# Altium PCB PCB1.PcbDoc
Units mil, origin at the board's own origin, x right, y up, seen from the top; angles counter-clockwise.
Board outline 6000 x 4000 mil, 2 copper layers (Top Layer, Bottom Layer); 16 components, 9 nets, 48 pads, 24 vias.
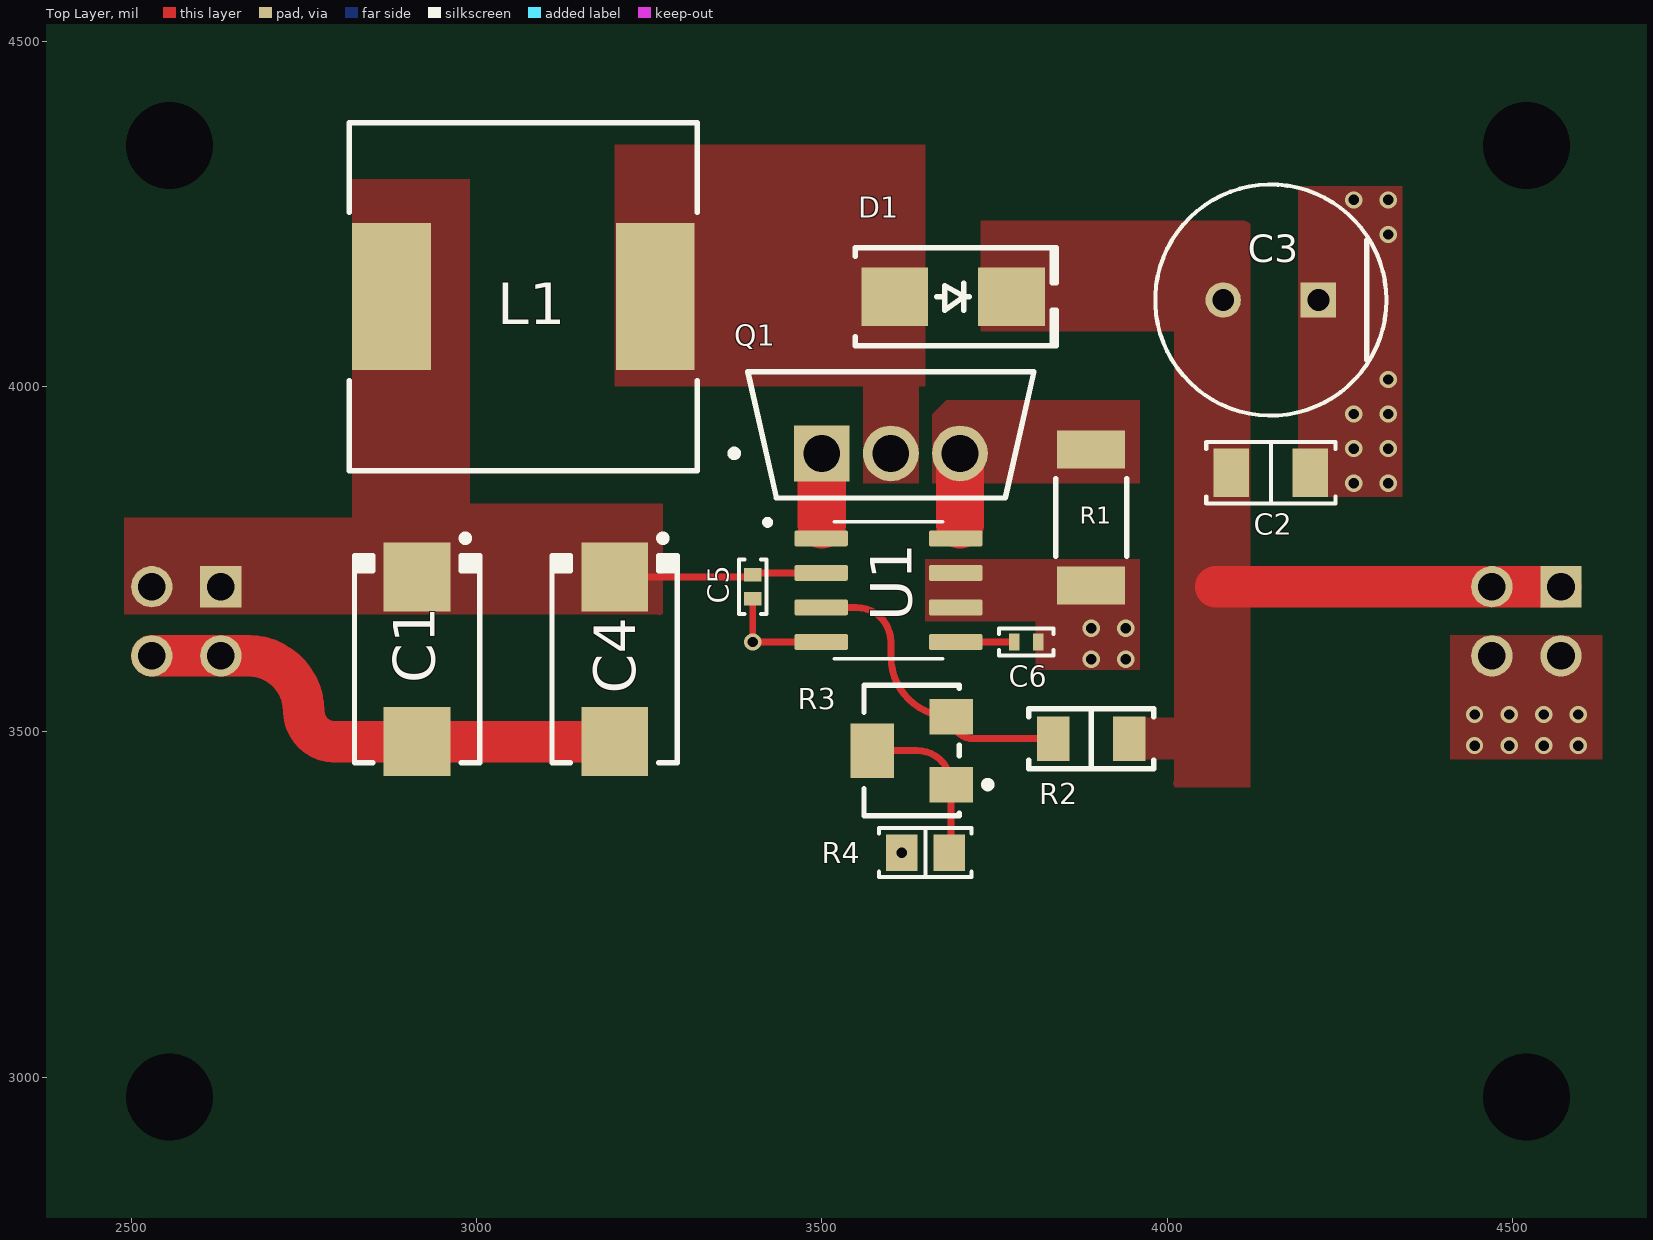
[diagram p0: Top Layer view]
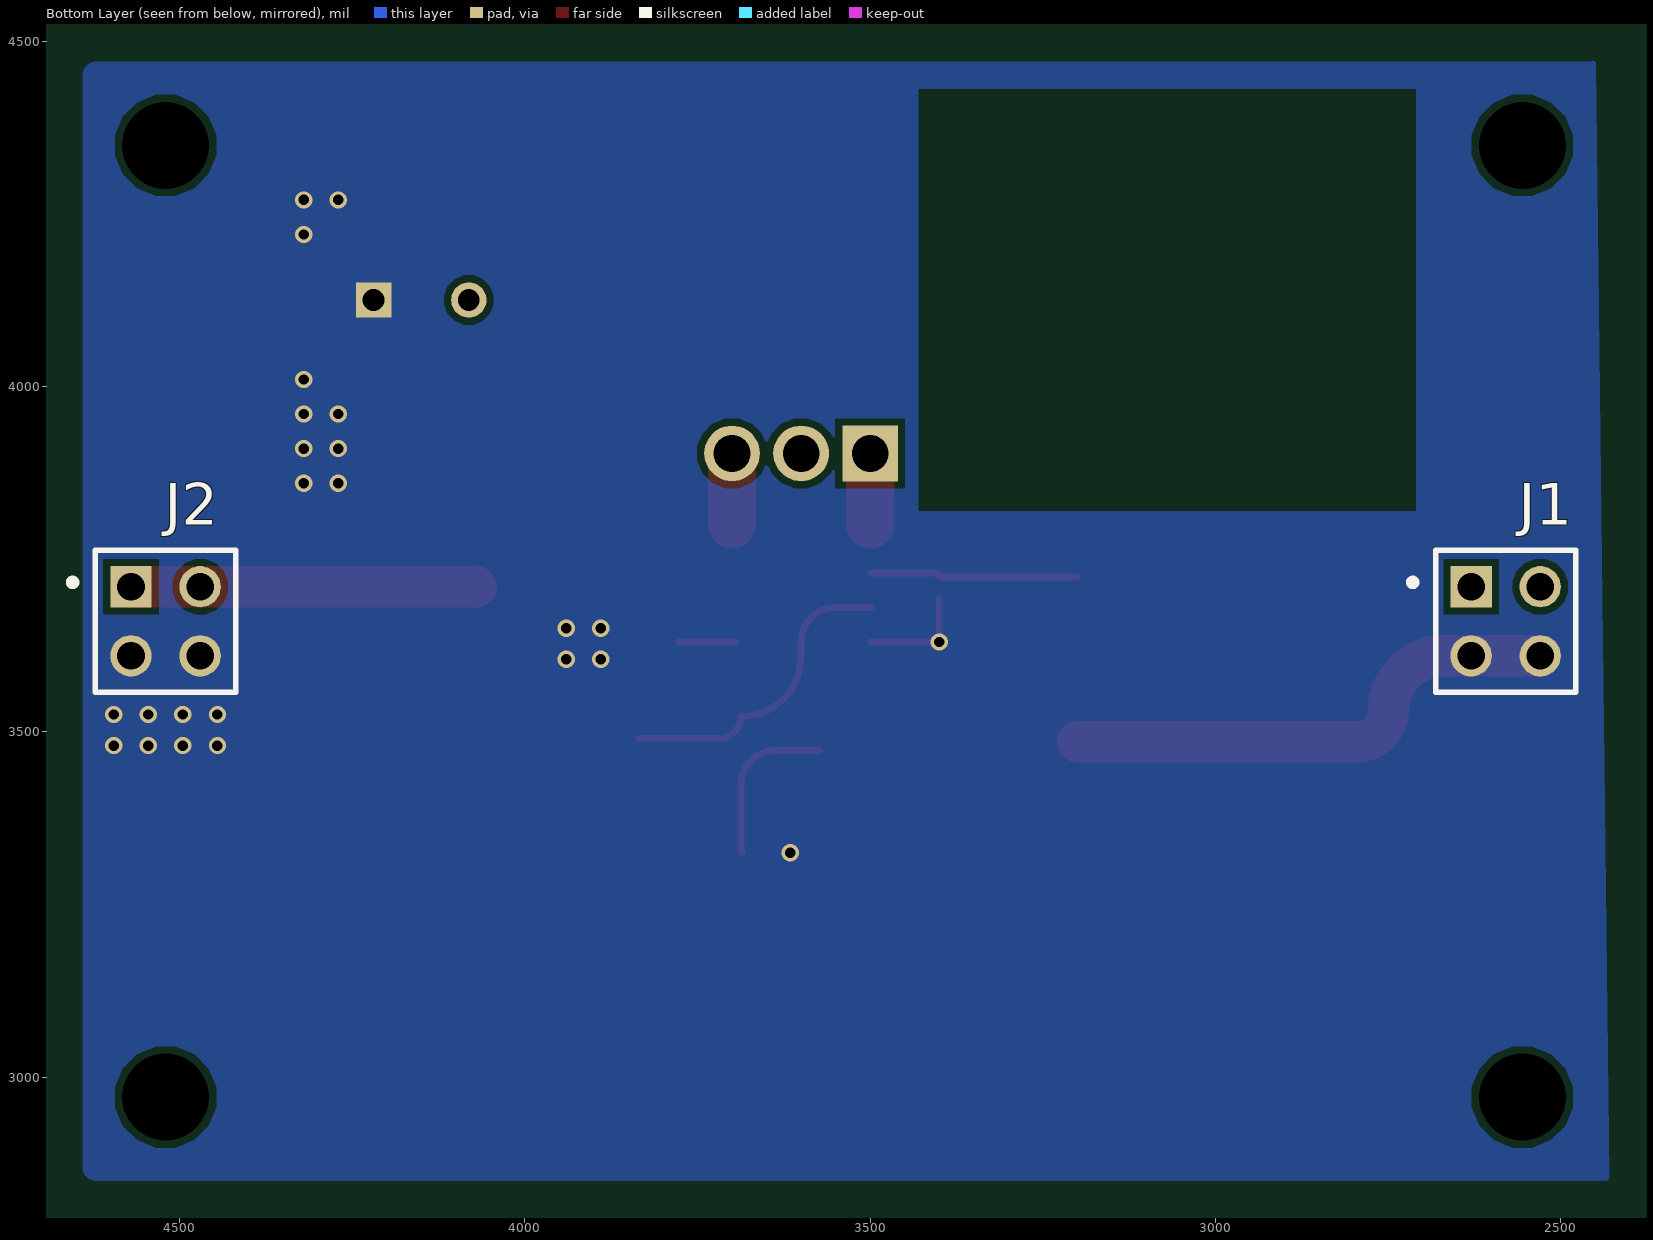
[diagram p1: Bottom Layer view, seen from below]
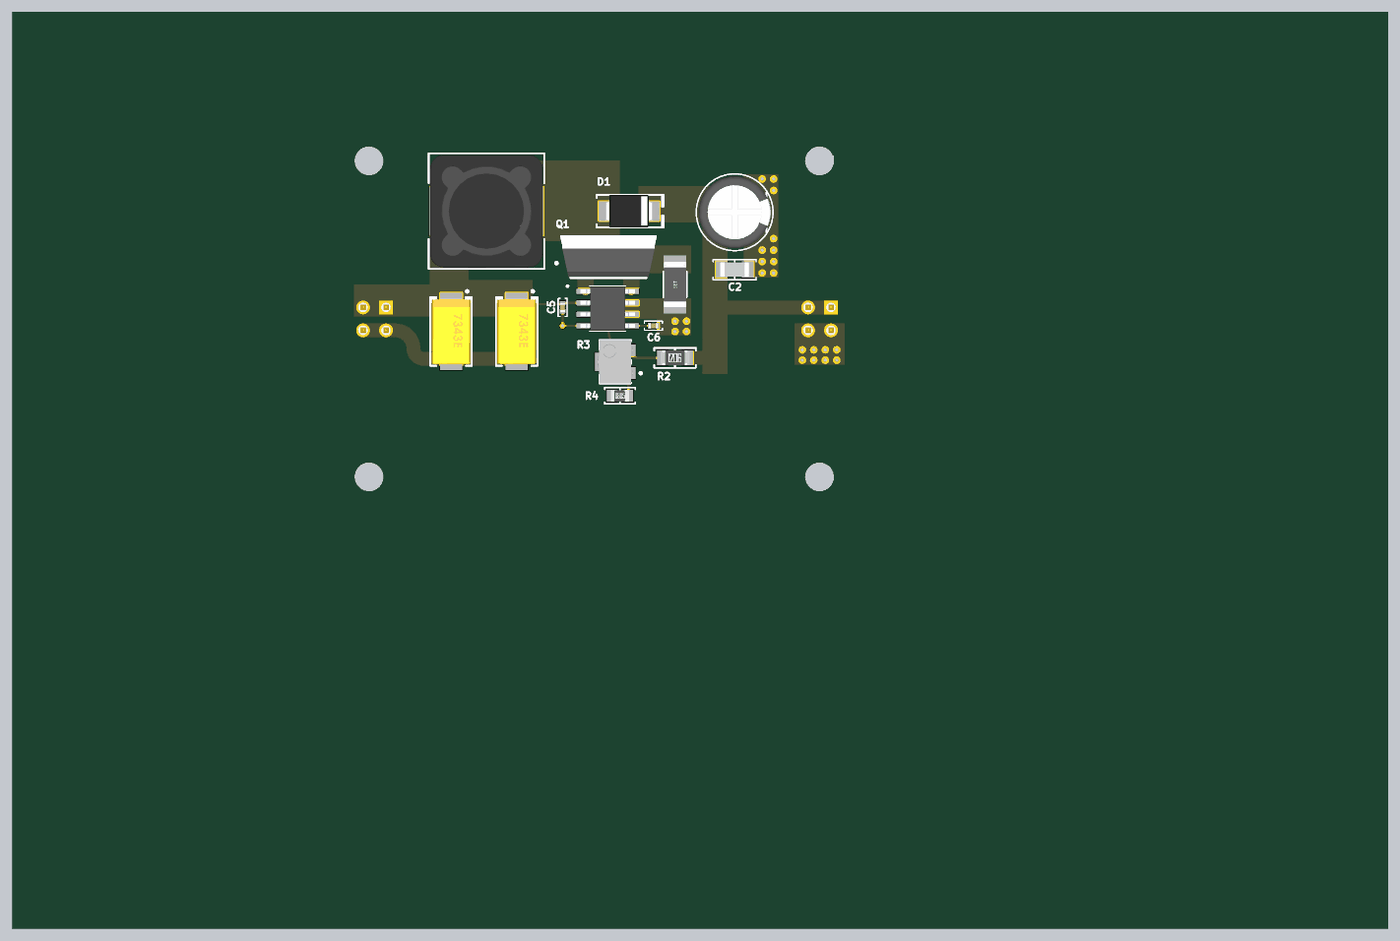
[diagram p2: 3D render of the assembled board from above, using the file's embedded part models]

## Layer stack, top to bottom
Top Solder: solder mask 0.4, Solder Resist, Dk 3.5
Top Layer: signal copper 1.4
Dielectric 1: dielectric 12.6, FR-4, Dk 4.8
Bottom Layer: signal copper 1.4
Bottom Solder: solder mask 0.4, Solder Resist, Dk 3.5

## Board outline
1000,1000 7000,1000 7000,5000 1000,5000

## Design rules (kind name [scope] priority, off if disabled: settings)
Clearance [All] p1: gap=10 ignorepadtopadclearanceinfootprint=FALSE except(0: Arc-Hole Track-Hole SMDPad-Hole THPad-Hole Via-Hole Fill-Hole Poly-Hole Region-Hole Text-Hole)
HoleSize [All] p1: absolutevalues=TRUE maxlimit=200 minlimit=1 maxpercent=80.000 minpercent=20.000
MinimumSolderMaskSliver [All] p1: minsoldermaskwidth=6
PolygonConnect [All] p1: connectstyle=Direct reliefconductorwidth=10 reliefentries=4 polygonreliefangle="90 Angle" airgapwidth=10
RoomDefinition HV [InComponentClass('HV')] p1: confinementstyle=ConfineIn formatcopy=TRUE lockcomponents=FALSE outline 2420,2820 4670,2820 4670,4520 2420,4520
RoutingVias [All] p1: holewidth=10 width=20 viastyle="Through Hole" minholewidth=10 minwidth=20 maxholewidth=28 maxwidth=50
SilkToSilkClearance [All] p1: silktosilkclearance=7
SilkToSolderMaskClearance [IsPad] p1: minsilkscreentomaskgap=4 clearancetoexposedcopper=TRUE
SolderMaskExpansion [All] p1: expansion=4 istentingtop=FALSE
Width [All] p1: maxlimit=100 minlimit=10 preferedwidth=10 bottomlayer_maxwidth=10 minimp=50.000000 maximp=50.000000 favimp=50.000000
26 further rules are at their usual default settings.

## Components (designator, comment, footprint, x,y, rotation, side; value= is the part's Value field where it differs from the comment)
C1 "100uF" "CAP POL 2917_7343" 2914.06,3605 r270 top value="100 µF"
C2 "0.1 µF" "CAP 1206_3216 - 0.8MM" 4150,3875 r180 top
C3 "4.7uF 250V" FP-RAD-TH-D_8_0_5-L_11_5-MFG 4150,4125 r180 top
C4 "10 µF" "CAP POL 2917_7343" 3200,3605 r270 top
C5 "0.1 µF" "CAP 0402_1005"#1 3400,3710 r90 top
C6 "0.1 µF" "CAP 0402_1005"#2 3795.88,3630 r180 top
D1 "ES2F-E3/5BT" "DO214AA SMB" 3690,4130 r0 top
J1 "HTSW-102-07-G-D" FP-HTSW-102-07-G-D-MFG 2580,3660 r270 bottom
J2 "HTSW-102-07-G-D" FP-HTSW-102-07-G-D-MFG 4520,3660 r270 bottom
L1 "100uH" "BOURNS SRR1280" 3067.94,4130 r0 top
Q1 "IRF644PBF" FP-E21-0621-MFG 3600,3930 r90 top
R1 "50m" FP-CSRN2010-MFG 3890,3810 r90 top
R2 "1.5 MOhms" "RES 1206_3216" 3890,3490 r0 top
R3 "3214W-1-502E" BOUR-3214W_V 3630,3472.81 r180 top
R4 "10 kOhms" "RES 0805_2012" 3650,3325 r0 top
U1 "MAX1771CSA" SOIC127P600X175-8N 3596.5,3705 r0 top

## Footprints (in the part's own frame and the unit in brackets; to place one, negate y for a bottom-side part, rotate by r counter-clockwise, add the part's x,y. Pads: shape width x height; smd on the part's side, far side on the other; paste and mask are expansions set on the pad)
BOUR-3214W_V [mm] "SMD, 3-Leads, Body 3.5x4.8mm, Pitch 1.25mm"
  rect 1.6x1.3 smd paste+0: 1(-1.45,1.25) 3(-1.45,-1.25)
  rect 1.6x2 smd paste+0: 2(1.45,0)
  silkscreen extent -2.93,-2.4 1.75,2.4, body extent -1.98,-2.41 1.98,2.41, height 5.28
"BOURNS SRR1280" [mm] "Precision Wire Wound Inductor, 2-Leads, Body 12.50x12.50mm, IPC Medium Density"
  rect 2.9x5.4 smd: 1(-4.85,0) 2(4.85,0)
  silkscreen extent -6.4,-6.4 6.4,6.4, body extent -6.25,-6.25 6.25,6.25, height 7.9
"CAP 0402_1005"#1 [mm] "Chip Capacitor, 2-Leads, Body 1.02x0.51mm, IPC Medium Density"
  rect 0.508x0.64 smd: 1(-0.44,0) 2(0.44,0)
  silkscreen extent -1,-0.5 1,0.5, body extent -0.5,-0.26 0.5,0.26, height 0.52
"CAP 0402_1005"#2 [mm] "Chip Capacitor, 2-Leads, Body 1.02x0.51mm, IPC Medium Density"
  rect 0.381x0.64 smd: 1(-0.44,0)
  rect 0.381x0.635 smd: 2(0.44,0)
  silkscreen extent -1,-0.5 1,0.5, body extent -0.5,-0.26 0.5,0.26, height 0.52
"CAP 1206_3216 - 0.8MM" [mm] "Chip Capacitor, 2-Leads, Body 3.25x1.60mm, IPC Medium Density"
  rect 1.3x1.8 smd: 1(-1.45,0) 2(1.45,0)
  silkscreen extent -2.37,-1.12 2.37,1.12, body extent -1.6,-0.8 1.6,0.8, height 0.8
"CAP POL 2917_7343" [mm] "Molded Capacitor, 2-Leads, Body 7.30x4.30mm, IPC Medium Density"
  rect 2.55x2.45 smd: 1(-3.025,0) 2(3.025,0)
  silkscreen extent -4.57,-2.3 3.8,2.3, body extent -3.65,-2.15 3.65,2.15, height 4.1
"DO214AA SMB" [mm] "Molded Diode, 2-Leads, Body 4.31x3.62mm, IPC Medium Density"
  rect 2.45x2.15 smd: 1(-2.15,0) 2(2.15,0)
  silkscreen extent -3.6,-1.8 3.8,1.8, body extent -2.6,-1.8 2.6,1.8, height 2.4
FP-CSRN2010-MFG [mm]
  rect 1.4x2.5 smd paste+0 mask+0: 1(-2.5,0) 2(2.5,0)
  silkscreen extent -1.43,-1.3 1.43,1.3, body extent -3.3,-1.4 3.3,1.4, height 0.25
FP-E21-0621-MFG [mm]
  rect 2.05x2.05 hole 1.35 paste-1000 mask+0: 1(-0.685,2.54)
  round 2.05 hole 1.35 paste-1000 mask+0: 2(-0.685,0) 3(-0.685,-2.54)
  silkscreen extent -2.32,-5.26 2.32,5.88, body extent -2.42,-5.36 2.42,5.36, height 0.25
FP-HTSW-102-07-G-D-MFG [mm]
  rect 1.52x1.52 hole 1.02 paste-1000 mask+0: 1(-1.27,-1.27)
  round 1.52 hole 1.02 paste-1000 mask+0: 2(-1.27,1.27) 3(1.27,-1.27) 4(1.27,1.27)
  silkscreen extent -2.6,-3.55 2.6,2.58, body extent -2.55,-2.56 2.53,2.52, height 8.7
FP-RAD-TH-D_8_0_5-L_11_5-MFG [mm]
  rect 1.3x1.3 hole 0.8 paste-1000 mask+0: 1(-1.75,0)
  round 1.3 hole 0.8 paste-1000 mask+0: 2(1.75,0)
  silkscreen extent -4.25,-4.25 4.25,4.25, body extent -4.35,-4.35 4.35,4.35, height 0.25
"RES 0805_2012" [mm] "Chip Resistor, 2-Leads, Body 2.00x1.25mm, IPC Medium Density"
  rect 1.15x1.35 smd: 1(-0.875,0) 2(0.875,0)
  silkscreen extent -1.7,-0.9 1.7,0.9, body extent -1,-0.62 1,0.63, height 0.6
"RES 1206_3216" [mm] "Chip Resistor, 2-Leads, Body 3.13x1.55mm, IPC Medium Density"
  rect 1.2x1.65 smd: 1(-1.4,0) 2(1.4,0)
  silkscreen extent -2.3,-1.1 2.3,1.1, body extent -1.6,-0.8 1.6,0.8, height 0.6
SOIC127P600X175-8N [mm]
  rrect25% 1.97x0.59 smd: 1(-2.475,1.905) 2(-2.475,0.635) 3(-2.475,-0.635) 4(-2.475,-1.905) 5(2.475,-1.905) 6(2.475,-0.635) 7(2.475,0.635) 8(2.475,1.905)
  silkscreen extent -4.54,-2.52 2,2.59, body extent -3,-2.45 3,2.45, height 1.75

## Part data
C1: library part T495X106K035ATE200, "TPSD107K020R0150", Capacitance="100 µF", Device Package="2917 (7343 Metric)", ESR (Equivalent Series Resistance)=200mOhm, Lifetime @ Temp.="2000 Hrs @ 85°C", manufacturer=KEMET, Manufacturer Size Code=X, Operating Temperature="-55°C ~ 125°C", Supplier Part Number 1=399-10388-1-ND, Tolerance=±10%, Voltage - Rated="35 V", componentlink1description=Datasheet, componentlink1url=https://api.kemet.com/component-edge/download/datasheet/T495X106K035ATE200.pdf, componentlink2description="DigiKey Link", componentlink2url=https://www.digikey.com/en/products/detail/kemet/T495X106K035ATE200/3880123, Features="General Purpose", Height - Seated (Max)="0.169\" (4.30mm)", lastupdated="27.02.2023 20:44:53", Lifecycle Status=Active, Minimum Order=1, Mounting Type="Surface Mount", Package / Case="2917 (7343 Metric)", Packaging=TapeAndReel, Part Number=T495X106K035ATE200, Part Status=Active, partid=772, price=1.22, Series=T495, Size / Dimension="0.287\" L x 0.169\" W (7.30mm x 4.30mm)", Supplier 1=DigiKey, Type=Molded
C2: library part CC1206KKX7RYBB104, "CAP CER 0.1UF 250V X7R 1206", Device Package="1206 (3216 Metric)", manufacturer=Yageo, Operating Temperature="-55°C ~ 125°C", Supplier Part Number 1=311-1976-1-ND, Temperature Coefficient=X7R, Tolerance=±10%, Voltage - Rated=250V, Applications="General Purpose", Capacitance="0.1 µF", componentlink1description=Datasheet, componentlink1url=http://www.yageo.com/documents/recent/UPY-NP0X7R_MV_100-to-630V_21.pdf, componentlink2description="DigiKey Link", componentlink2url=https://www.digikey.com/en/products/detail/yageo/CC1206KKX7RYBB104/5195382, lastupdated="28.02.2023 20:14:01", Lifecycle Status=Active, Minimum Order=1, Mounting Type="Surface Mount, MLCC", Package / Case="1206 (3216 Metric)", Packaging=TapeAndReel, Part Number=CC1206KKX7RYBB104, Part Status=Active, partid=18767, price=0.05, Series=CC, Size / Dimension="0.126\" L x 0.063\" W (3.20mm x 1.60mm)", Supplier 1=DigiKey, Thickness (Max)="0.071\" (1.80mm)"
C3: library part CMP-05427-001567-1, "A759KS475M2EBAE496", Capacitance=4.7uF, Case/Package=Radial, Max Operating Temperature=105°C, Min Operating Temperature=-25°C, Package Quantity=1000, Ripple Current=50mA, Tolerance=20%, Voltage Rating=200V, Diameter=8mm, Height=11.5mm, Height - Seated (Max)=0.492inch, Lead Pitch=5mm, Lead/Base Style=Straight, Length=11.5mm, Life (Hours)=2000Hour, Mount="Through Hole", Packaging="Tape and Reel", Radiation Hardening=No, RoHS Compliant=Yes, Series=NHG, Termination=Radial, Voltage Rating (DC)=200V
C4: library part T495X106K035ATE200, "TPSD106K035R0300", Device Package="2917 (7343 Metric)", ESR (Equivalent Series Resistance)=200mOhm, Lifetime @ Temp.="2000 Hrs @ 85°C", manufacturer=KEMET, Manufacturer Size Code=X, Operating Temperature="-55°C ~ 125°C", Supplier Part Number 1=399-10388-1-ND, Tolerance=±10%, Voltage - Rated="35 V", Capacitance="10 µF", componentlink1description=Datasheet, componentlink1url=https://api.kemet.com/component-edge/download/datasheet/T495X106K035ATE200.pdf, componentlink2description="DigiKey Link", componentlink2url=https://www.digikey.com/en/products/detail/kemet/T495X106K035ATE200/3880123, Features="General Purpose", Height - Seated (Max)="0.169\" (4.30mm)", lastupdated="27.02.2023 20:44:53", Lifecycle Status=Active, Minimum Order=1, Mounting Type="Surface Mount", Package / Case="2917 (7343 Metric)", Packaging=TapeAndReel, Part Number=T495X106K035ATE200, Part Status=Active, partid=772, price=1.22, Series=T495, Size / Dimension="0.287\" L x 0.169\" W (7.30mm x 4.30mm)", Supplier 1=DigiKey, Type=Molded
C5 C6: library part CGA2B3X7R1V104M050BB, "CAP CER 0.1UF 35V X7R 0402", Part Number=CGA2B3X7R1V104M050BB
D1: "DIODE GEN PURP 300V 2A DO214AA     ES2F-E3/52TVISHAY / TME", Part Number=ES2F-E3/5BT
J1 J2: library part CMP-02766-000010-1, "CONN HEADER VERT 4POS 2.54MM", Current Rating=6.3A, manufacturer=Samtec, Temperature="-55°C to +125°C", Temperature Range High=+125°C, Temperature Range Low=-55°C, Voltage Rating=550V, Automotive=No, Category=Conn, componentlink2description=Datasheet, componentlink2url=http://suddendocs.samtec.com/catalog_english/htsw_th.pdf, Conn Gender=Male, Conn Orientation=Straight, Contact Material=Gold,Nickel, Device Class L1=Connectors, Device Class L2="Headers and Wire Housings", Device Class L3=unset, Digikey Description="CONN HEADER VERT 4POS 2.54MM", Height=8.71mm, Lead Free=Yes, Manufacturer Part Number=HTSW-102-07-G-D, Mouser Description="Conn Unshrouded Header HDR 4 POS 2.54mm Solder ST Thru-Hole Bag", Number of Contacts=4, Number of Rows=2, Octopart=https://octopart.com/htsw-102-07-g-d-samtec-10531767, Package=HTSW-102-07-G-D, Pitch=2.54mm, RoHS=TRUE
L1: library part SRR1280-101M, "FIXED IND 100UH 2.1A 150MOHM SMD", Part Number=SRR1280-101M
Q1: library part CMP-02550-000289-1, "N-MOSFET; unipolarny; 250V; 8,5A; 125W; TO220AB", Case/Package=TO-220AB, Continuous Drain Current (ID)=4.5A, Drain to Source Breakdown Voltage=500V, Drain to Source Resistance=1.5R, Gate to Source Voltage (Vgs)=20V, Input Capacitance=610pF, Max Operating Temperature=150°C, Max Power Dissipation=74W, Min Operating Temperature=-55°C, Package Quantity=50, Threshold Voltage=4V, Contact Plating=Tin, Current Rating=4.5A, Drain to Source Voltage (Vdss)=500V, Drain-source On Resistance-Max=1.5R, Element Configuration=Single, Fall Time=16ns, Height=9.01mm, Lead Free="Lead Free", Length=10.41mm, Mount="Through Hole", Nominal Vgs=4V, Number of Channels=1, Number of Elements=1, Number of Pins=3, On-State Resistance=1.5R, Packaging=Rail/Tube, Polarity=N-CHANNEL, Polarization=N, Power Dissipation=74W, Radiation Hardening=No, Rds On Max=1.5R, Recovery Time=640ns, Rise Time=16ns, RoHS Compliant=Yes, Turn-Off Delay Time=42ns, Turn-On Delay Time=8.2ns, Voltage Rating (DC)=500V, Weight=0.211644oz, Width=4.7mm
R1: library part CMP-26527-001458-1, "Res Thick Film 2010 50mΩ 1% 1W ±250ppm/°C Molded SMD Plastic T/R", Case Code (Imperial)=2010, Case Code (Metric)=5025, Max Operating Temperature=155°C, Max Power Dissipation=1W, Min Operating Temperature=-55°C, Resistance=50mR, Resistor Type="Thick Film", Temperature Coefficient=250ppm/°C, Tolerance=1%, Case/Package=2010, Contact Plating=Tin, Height=0.03inch, Lead Free="Lead Free", Length=0.197inch, Mount="Surface Mount", Number of Terminations=2, Packaging="Tape and Reel", Power Rating=1W, Radiation Hardening=No, RoHS Compliant=Yes, Series=CSRN, Width=0.097inch
R2: library part CRCW12061M50JNEA, "ESR18EZPF1504", Device Package="1206 (3216 Metric)", manufacturer="Vishay Dale", Operating Temperature="-55°C ~ 155°C", Power (Watts)="0.25W, 1/4W", Ratings=AEC-Q200, Supplier Device Package=1206, Supplier Part Number 1=541-1.5MECT-ND, Temperature Coefficient=±200ppm/°C, Tolerance=±5%, componentlink1description=Datasheet, componentlink1url=http://www.vishay.com/docs/20035/dcrcwe3.pdf, componentlink2description="DigiKey Link", componentlink2url=http://digikey.com/product-detail/en/vishay-dale/CRCW12061M50JNEA/541-1.5MECT-ND/1181391, Composition="Thick Film", Features="Automotive AEC-Q200", Height - Seated (Max)="0.024\" (0.60mm)", lastupdated="27.02.2023 20:36:38", Lifecycle Status=Active, Minimum Order=1, Number of Terminations=2, Package / Case="1206 (3216 Metric)", Packaging=TapeAndReel, Part Number=CRCW12061M50JNEA, Part Status=Active, partid=27543, price=0.01, Resistance="1.5 MOhms", Series=CRCW, Size / Dimension="0.126\" L x 0.063\" W (3.20mm x 1.60mm)", Supplier 1=DigiKey
R3: library part CMP-2000-05579-1, "3214 - 5-Turn Trimpot(R) Trimming Potentiometer, 5 KOhm, +/- 10%, 0.25 W, -65 to 150 degC, RoHS, Tape and Reel", manufacturer=Bourns, Package Description="3-Pin Surface Mount Device, Body 3.5 x 4.8 mm, Pitch 1.25 mm", Package Reference=3214W, Power Rating=250mW, Resistance Tolerance=±10%, Temperature Coefficient=±100ppm/°C, Track Resistance=5kohm, Datasheet URL=http://www.bourns.com/docs/Product-Datasheets/3214.pdf, Datasheet Version=05/2016, Manufacturer URL=http://www.bourns.com/, Mounting Technology=SurfaceMount, No. of Turns=5, Potentiometer Mounting=SMD, RoHS Compliant=Yes, SVHC=NoSVHC(16-Jun-2014)
R4: library part CPF0805B10KE, "RES SMD 10K OHM 0.1% 1/10W 0805", Device Package="0805 (2012 Metric)", manufacturer="TE Connectivity Passive Product", Operating Temperature="-55°C ~ 155°C", Power (Watts)="0.1W, 1/10W", Supplier Device Package=0805, Supplier Part Number 1=A106043CT-ND, Temperature Coefficient=±25ppm/°C, Tolerance=±0.1%, componentlink1description=Datasheet, componentlink1url=https://www.te.com/commerce/DocumentDelivery/DDEController?Action=srchrtrv&DocNm=1773200&DocType=DS&DocLang=English, componentlink2description="DigiKey Link", componentlink2url=https://www.digikey.com/en/products/detail/te-connectivity-passive-product/CPF0805B10KE/2389790, Composition="Thin Film", Height - Seated (Max)="0.026\" (0.65mm)", lastupdated="27.02.2023 20:43:05", Lifecycle Status=Active, Minimum Order=1, Number of Terminations=2, Package / Case="0805 (2012 Metric)", Packaging=TapeAndReel, Part Number=CPF0805B10KE, Part Status=Active, partid=27724, price=0.10, Resistance="10 kOhms", Series="CPF, Neohm", Size / Dimension="0.079\" L x 0.049\" W (2.00mm x 1.25mm)", Supplier 1=DigiKey
U1: "Boost, Buck-Boost Regulator Positive Output Step-Up, Step-Up/Step-Down - DC-DC Controller IC 8-SOIC", Package="SOIC-8 Maxim", Availability="In Stock", Check_prices=https://www.snapeda.com/parts/MAX1771CSA/Maxim+Integrated/view-part/?ref=eda, MF="Maxim Integrated", MP=MAX1771CSA, price=None, Purchase-URL=https://pricing.snapeda.com/search/part/MAX1771CSA/?ref=eda, SnapEDA_Link=https://www.snapeda.com/parts/MAX1771CSA/Maxim+Integrated/view-part/?ref=snap

## Free pads (board coordinates)
  round 60 hole 125.98 unplated: 2(2556,2971) 2(2556,4349) 2(4520,2971) 2(4520,4349)

## Via types
v1: diameter 25, hole 15, Top Layer to Bottom Layer, 24 vias

## Nets (pads, with @x,y where several pads share a name; then routed paths per layer and width w, separated by ;. In a path a pad name is that pad's centre, name@x,y a point inside that pad or via, vN(x,y) a via of type N, cw(c..) or ccw(c..) an arc to the next point about the centre after c; other vN are vias at no path point)
+12: C1.1 C4.1 C5.2 J1.1 J1.2 L1.1 U1.2 | length 302.4
  Top Layer w10: C4.1 3396.77,3724.09 ccw(c3396.77,3730) 3402.68,3730 U1.2
CS: Q1.3 R1.2 U1.8 | length 103
  Top Layer w70: 3700,3800 Q1.3
FB: R2.1 R3.3 U1.3 | length 453.2
  Top Layer w10: U1.3 3550,3680 cw(c3550,3630) 3600,3630 3600,3609.1 ccw(c3687.09,3609.1) R3.3 ccw(c3719.1,3522.02) 3719.1,3490 R2.1
GND: C1.2 C2.1 C3.1 C4.2 C5.1 C6.1 J1.3 J1.4 J2.3 J2.4 R1.1 R4.1 U1.4 U1.6 U1.7 | length 902.6
  Top Layer w10: C5.1 v1(3400,3630) U1.4
  Top Layer w60: J1.4 J1.3 2670,3610 cw(c2670,3530) 2750,3530 ccw(c2794.09,3530) 2794.09,3485.91 C1.2 C4.2
  other v1: 3615.55,3325 4445,3480 4495,3480 4545,3480 4595,3480 4445,3525 4495,3525 4545,3525 4595,3525 3890,3605 3940,3605 3890,3650 3940,3650 4270,3860 4320,3860 4270,3910 4320,3910 4270,3960 4320,3960 4320,4010 4320,4220 4270,4270 4320,4270
HV: C2.2 C3.2 D1.2 J2.1 J2.2 R2.2 | length 500
  Top Layer w60: 4070,3710 J2.2 J2.1
NetD1_1: D1.1 L1.2 Q1.2
NetQ1_1: Q1.1 U1.1 | length 104.4
  Top Layer w10: Q1.1@3499.06,3902.09 Q1.1
  Top Layer w70: 3500,3800 Q1.1
NetR3_1: R3.1 R3.2 R4.2 | length 242.4
  Top Layer w10: R3.2 3637.87,3472.81 cw(c3637.87,3423.59) R3.1 3687.09,3327.64 cw(c3684.45,3327.64) R4.2
REF: C6.2 U1.5 | length 84.6
  Top Layer w10: U1.5 C6.2

## Polygon pours and split planes (outlines as drawn)
GND on Top Layer "GND_L01_P016" (solid, pour order 16): 4410,3640 4630,3640 4630,3460 4410,3460
+12 on Top Layer "+12_L01_P014" (solid, pour order 14): 2490,3810 2850,3810 2850,3670 2490,3670
GND on Top Layer "GND_L01_P013" (solid, pour order 13): 4190,3840 4190,4290 4340,4290 4340,3840
HV on Top Layer "HV_L01_P011" (solid, pour order 11): 3930,3520 3930,3460 4090,3460 4090,3520
HV on Top Layer "HV_L01_P009" (solid, pour order 9): 4117.07,4237.07 cw(c4117.07,4234.14) 4120,4234.14 4120,3420 4000,3420 ccw(c4000,3430) 4010,3430 4010,4240
HV on Top Layer "HV_L01_P008" (solid, pour order 8): 3730,4240 3730,4080 4120,4080 4120,4230 ccw(c4110,4230) 4110,4240
+12 on Top Layer "+12_L01_P007" (solid, pour order 7): 2820,3670 2820,4300 2990,4300 2990,3670
+12 on Top Layer "+12_L01_P006" (solid, pour order 6): 2820,3820 cw(c2830,3820) 2830,3830 3270,3830 3270,3660 ccw(c3260,3660) 3260,3670 2820,3670
GND on Top Layer "GND_L01_P005" (solid, pour order 5): 3810,3700 3960,3700 3960,3590 3810,3590
GND on Top Layer "GND_L01_P004" (solid, pour order 4): 3650,3750 3960,3750 3960,3660 3650,3660
CS on Top Layer "CS_L01_P003" (solid, pour order 3): 3660,3960 3680,3980 3960,3980 3960,3860 3660,3860
NetD1_1 on Top Layer "NETD1_1_L01_P001" (solid, pour order 1): 3560,3860 3640,3860 3640,4050 3560,4050
NetD1_1 on Top Layer "NETD1_1_L01_P000" (solid, pour order 0): 3200,4350 3650,4350 3650,4000 3200,4000
GND on Bottom Layer "GND_L02_P015" (solid, pour order 15): 2450,4480 ccw(c2460,4480) 2460,4470 4620,4470 cw(c4620,4450) 4640,4450 4640,2870 cw(c4620,2870) 4620,2850 2430,2850

## Other copper
Bottom Layer:
  pour cut-out: 2710,4430 3430,4430 3430,3820 2710,3820